# EAGLE board adapter (EAGLE 6.5.0)
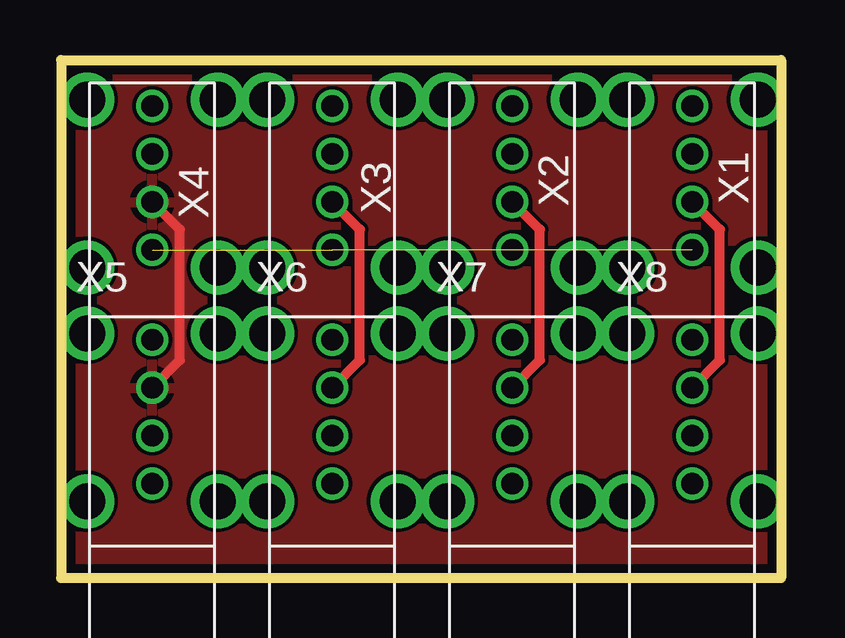
[diagram p0: board, top side]
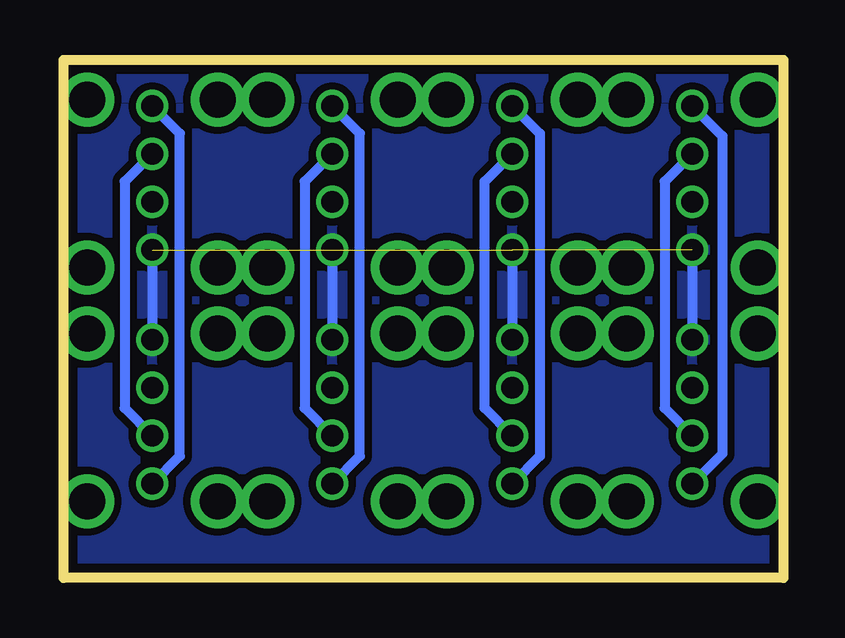
[diagram p1: board, bottom side, seen from below]

Size 30 x 21.6 mm. Coordinates in mm from the lower left corner, seen from the top.
Outline: 0,21.6 30,21.6 30,0 0,0 0,21.6
Copper layers (1*16): Top 0.0356mm / dielectric 1.5011mm / Bottom 0.0356mm
Design rules "LaenPCBOrder": minimum track width 6mil, minimum drill 13mil, track to track 6mil, track to pad 6mil, pad to pad 6mil, via to via 6mil, smd to smd 6mil, copper to edge 15mil, drill to drill 6mil, minimum pad ring 7mil, minimum via ring 7mil, stop-mask expansion 3mil, vias tented up to drill 0mil, thermal gap 10mil

## Footprints (pad centres in the part's own frame; a part is rotated, then mirrored left to right if it is on the bottom)
USB-A-HU = drill 0.9: D+ 2.73,0; D- 4.73,0; GND 0.73,0; VBUS 6.73,0 | drill 1.5: P$5 0,2.72; P$6 0,-2.72; P$7 7,2.72; P$8 7,-2.72

## Placement (x,y rotation side)
X1  USB-A-HU  [USB-A-HU]  26.3,12.95 90 top
X2  USB-A-HU  [USB-A-HU]  18.8,12.95 90 top
X3  USB-A-HU  [USB-A-HU]  11.3,12.95 90 top
X4  USB-A-HU  [USB-A-HU]  3.8,12.95 90 top
X5  USB-A-HU  [USB-A-HU]  3.8,3.2 90 top
X6  USB-A-HU  [USB-A-HU]  11.3,3.2 90 top
X7  USB-A-HU  [USB-A-HU]  18.8,3.2 90 top
X8  USB-A-HU  [USB-A-HU]  26.3,3.2 90 top

## Library data of the parts
X1-X8 = con-usb

## Nets
DM1: X4.D- X5.D+
DP1: X4.D+ X5.D-
GND: X1.GND X2.GND X3.GND X4.GND X5.VBUS X6.VBUS X7.VBUS X8.VBUS
N$1: X1.VBUS X8.GND
N$3: X3.D+ X6.D-
N$4: X3.D- X6.D+
N$6: X2.D+ X7.D-
N$7: X2.D- X7.D+
N$9: X1.D+ X8.D-
N$10: X2.VBUS X7.GND
N$11: X3.VBUS X6.GND
N$12: X4.VBUS X5.GND
N$13: X1.D- X8.D+

## Tracks (layer width: path | path; a pad name or v marks a point on that pad's centre or on a via)
DM1
  Bottom 0.406: X4.D- 4.95,16.53 4.95,7.08 X5.D+
DP1
  Top 0.406: X5.D- 4.95,9.08 4.95,14.53 X4.D+
  pour Top: 0.45,0.5 29.55,0.5 29.55,21.1 0.45,21.1 0.45,0.6
GND  (3 unrouted)
  Bottom 0.406: X4.GND X5.VBUS | X3.GND X6.VBUS | X2.GND X7.VBUS | X1.GND X8.VBUS
  pour Bottom (isolate 0.305): 0.45,0.4 29.55,0.4 29.55,21.2 0.45,21.2
N$1
  Bottom 0.406: X8.GND 25.15,5.08 25.15,18.53 X1.VBUS
N$3
  Top 0.406: X6.D- 12.45,9.08 12.45,14.53 X3.D+
N$4
  Bottom 0.406: X6.D+ 12.45,7.08 12.45,16.53 X3.D-
N$6
  Top 0.406: X7.D- 19.95,9.08 19.95,14.53 X2.D+
N$7
  Bottom 0.406: X2.D- 19.95,16.53 19.95,7.08 X7.D+
N$9
  Top 0.406: X8.D- 27.45,9.08 27.45,14.53 X1.D+
N$10
  Bottom 0.406: X7.GND 17.65,5.08 17.65,18.53 X2.VBUS
N$11
  Bottom 0.406: X3.VBUS 10.15,18.53 10.15,5.08 X6.GND
N$12
  Bottom 0.406: X4.VBUS 2.55,18.43 2.55,5.18 X5.GND
N$13
  Bottom 0.406: X1.D- 27.45,16.53 27.45,7.08 X8.D+